# Altium PCB LightsDriver.PcbDoc
Units mm, origin at the board's own origin, x right, y up, seen from the top; angles counter-clockwise.
Board outline 70 x 30 mm, 2 copper layers (Top Layer, Bottom Layer); 37 components, 17 nets, 96 pads, 18 vias.
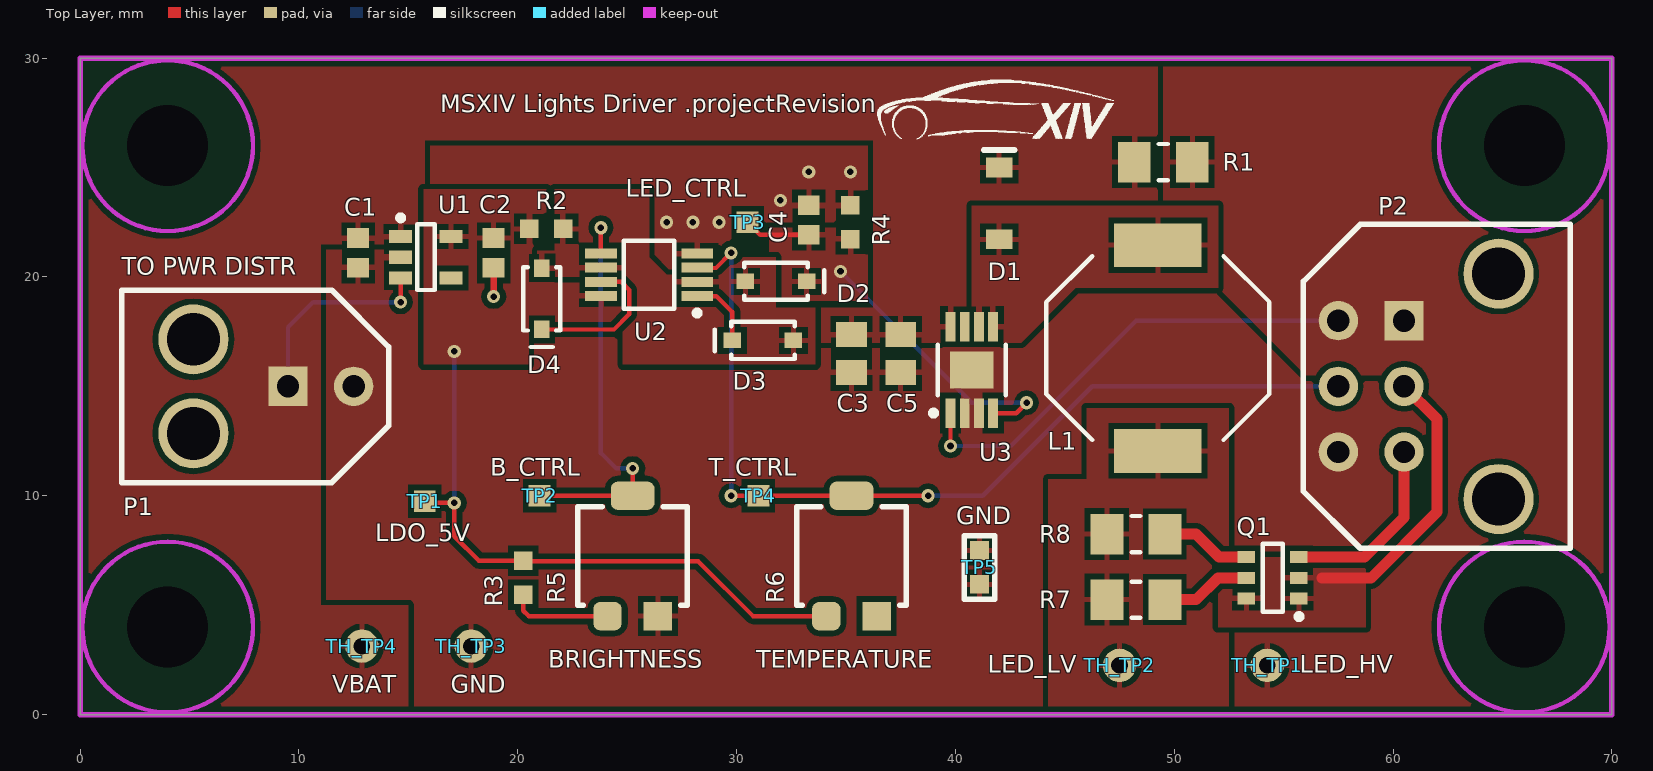
[diagram p0: Top Layer view]
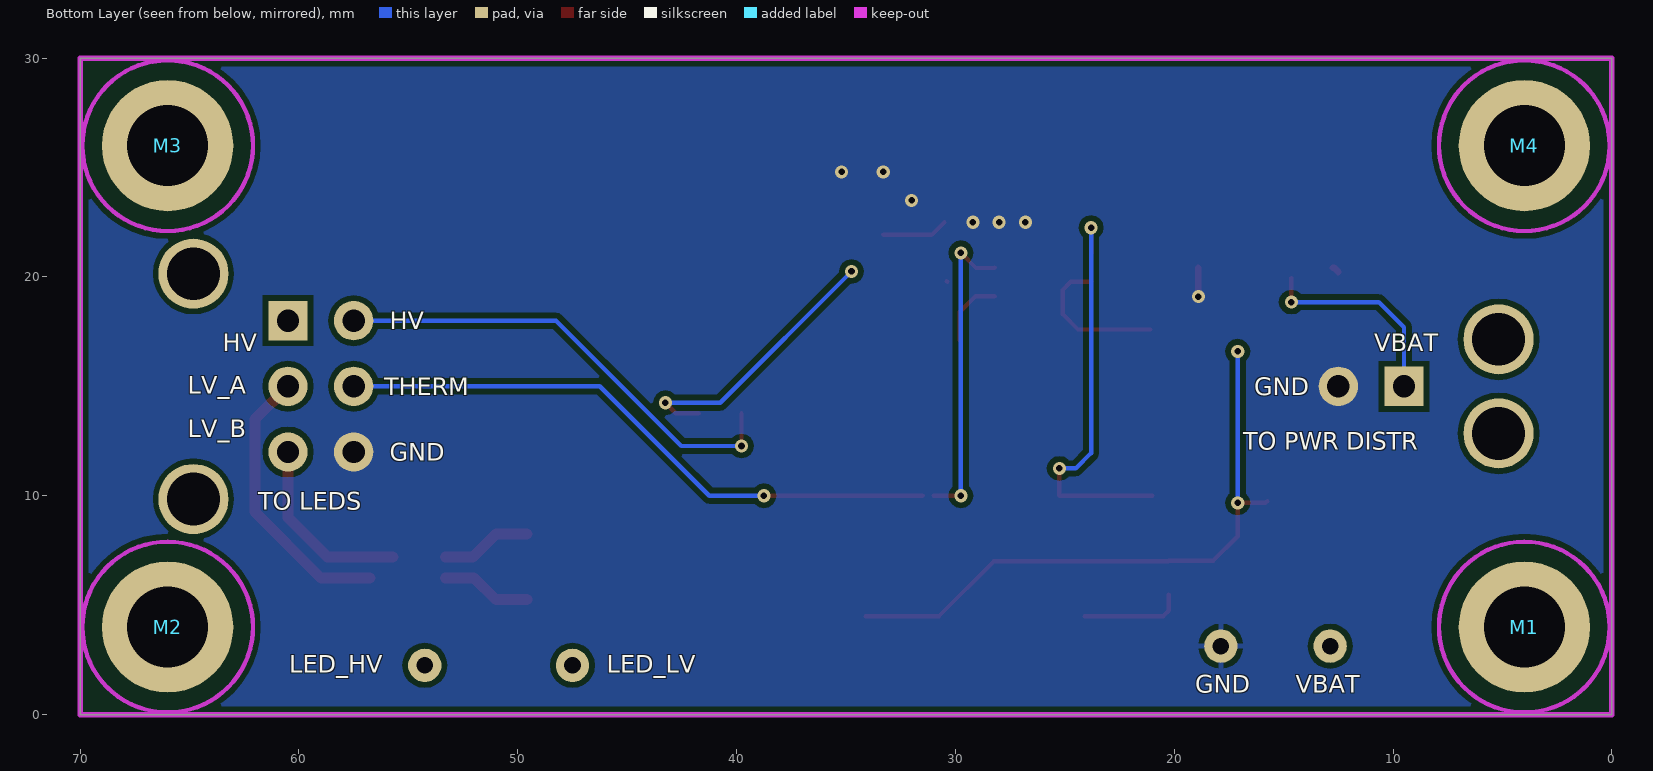
[diagram p1: Bottom Layer view, seen from below]
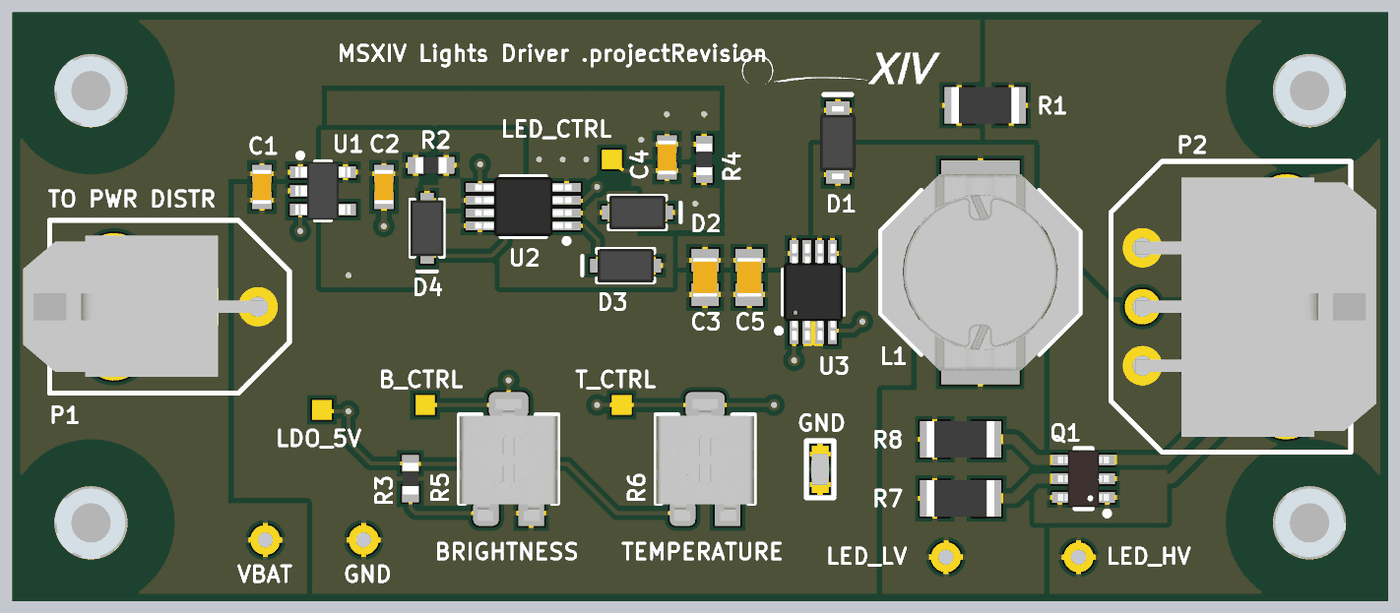
[diagram p2: 3D render of the assembled board from above, using the file's embedded part models]
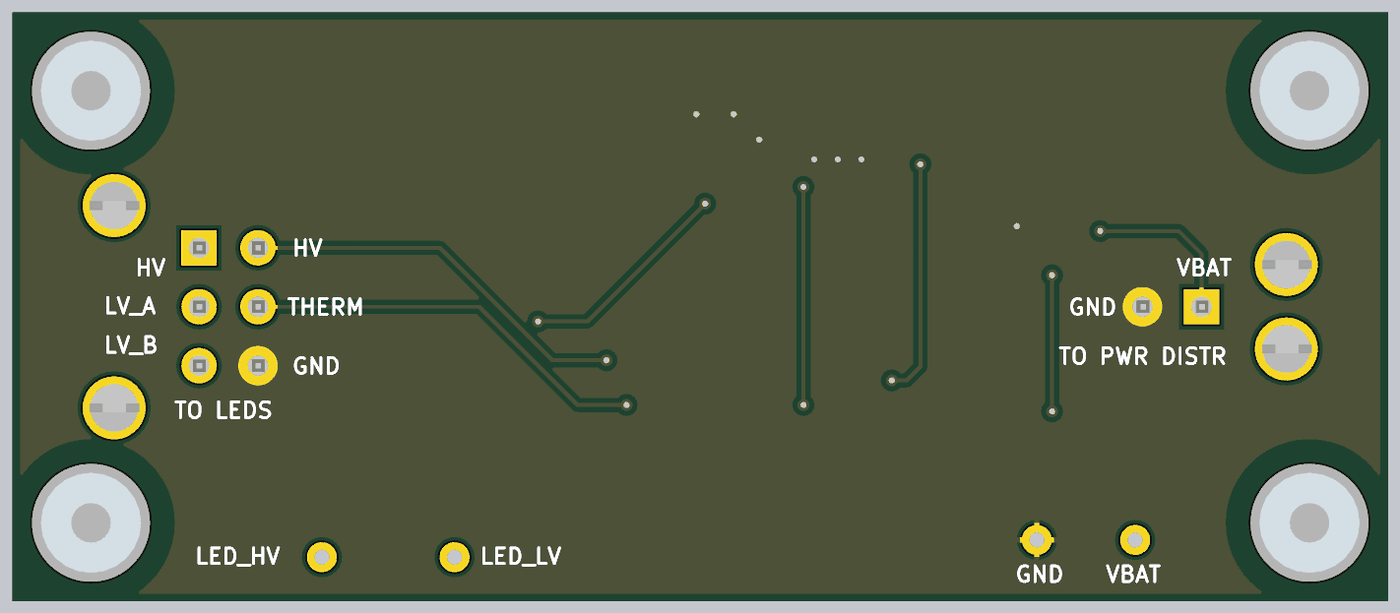
[diagram p3: 3D render of the assembled board from below, using the file's embedded part models]

## Layer stack, top to bottom
Top Solder: solder mask 0.0102, Solder Resist, Dk 3.5
Top Layer: signal copper 0.0356
Dielectric 1: dielectric 0.32, FR-4, Dk 4.8
Bottom Layer: signal copper 0.0356
Bottom Solder: solder mask 0.0102, Solder Resist, Dk 3.5

## Board outline
0,0 70,0 70,30 0,30

## Design rules (kind name [scope] priority, off if disabled: settings)
BoardOutlineClearance [All] p1: gap=0.295 ignorepadtopadclearanceinfootprint=FALSE
Clearance [All] p1: gap=0.254 ignorepadtopadclearanceinfootprint=TRUE except(0: Arc-Hole Track-Hole SMDPad-Hole THPad-Hole Via-Hole Fill-Hole Poly-Hole Region-Hole Text-Hole; 0.152: Arc-Arc Arc-Track Arc-SMDPad Track-Track Track-SMDPad SMDPad-SMDPad)
HoleSize [All] p1: absolutevalues=TRUE maxlimit=6.3 minlimit=0.025 maxpercent=80.000 minpercent=20.000
MinimumSolderMaskSliver [All] p1: minsoldermaskwidth=0.2
PolygonConnect PolygonConnect_Connectors [(InComponent('P1') OR InComponent('P2'))] p1: connectstyle=Direct reliefconductorwidth=0.254 reliefentries=4 polygonreliefangle="90 Angle" airgapwidth=0.254
PolygonConnect PolygonConnect_U3 [InNet('GND') vs InComponent('U3')] p2: thpad.connectstyle=Relief thpad.reliefconductorwidth=0.254 thpad.reliefentries=4 thpad.polygonreliefangle="90 Angle" thpad.airgapwidth=0.254 smdpad.connectstyle=Direct smdpad.reliefconductorwidth=0.254 smdpad.reliefentries=4 smdpad.polygonreliefangle="90 Angle" smdpad.airgapwidth=0.254 via.connectstyle=Direct via.reliefconductorwidth=0.254 via.reliefentries=4 via.polygonreliefangle="90 Angle" via.airgapwidth=0.254
PolygonConnect [All] p3: thpad.connectstyle=Relief thpad.reliefconductorwidth=0.254 thpad.reliefentries=4 thpad.polygonreliefangle="90 Angle" thpad.airgapwidth=0.254 smdpad.connectstyle=Relief smdpad.reliefconductorwidth=0.254 smdpad.reliefentries=4 smdpad.polygonreliefangle="90 Angle" smdpad.airgapwidth=0.254 via.connectstyle=Direct via.reliefconductorwidth=0.254 via.reliefentries=4 via.polygonreliefangle="90 Angle" via.airgapwidth=0.254
RoutingVias [All] p1: holewidth=0.3 width=0.6 viastyle="Through Hole" minholewidth=0.3 minwidth=0.6 maxholewidth=1 maxwidth=2
SilkToSilkClearance [All] p1: silktosilkclearance=0.152
SilkToSolderMaskClearance [IsPad] p1: minsilkscreentomaskgap=0.2 clearancetoexposedcopper=TRUE
SolderMaskExpansion SolderMaskExpansion_Via [IsVia] p1: expansion=0.102 istentingtop=TRUE
SolderMaskExpansion [All] p2: expansion=0.102 istentingtop=FALSE
Width [All] p1: maxlimit=1 minlimit=0.15 preferedwidth=0.2 minimp=50.000000 maximp=50.000000 favimp=50.000000
26 further rules are at their usual default settings.

## Components (designator, comment, footprint, x,y, rotation, side; value= is the part's Value field where it differs from the comment)
C1 "CAP CER 1UF 50V 10% X7R 0603" "CAP, 0603" 12.7,21.1 r270 top
C2 "CAP CER 2.2UF 25V 10% X5R 0603" "CAP, 0603" 18.9,21.1 r270 top
C3 "CAP CER 10uF 25V 10% X5R 0805" "CAP, 0805" 35.25,16.5 r270 top
C4 "CAP CER 10nF 50V 5% X7R 0603" "CAP, 0603" 33.3,22.6 r90 top
C5 "CAP CER 10uF 25V 10% X5R 0805" "CAP, 0805" 37.5,16.5 r270 top
D1 "DIODE SCHOTTKY 40V 1A SOD123F" "DIODE SOD123" 42,25 r270 top
D2 "DIODE GEN PURP 100V 300MA SOD123" "DIODE GEN PURP 100V 300MA SOD123" 31.8,19.8 r180 top
D3 "DIODE GEN PURP 100V 300MA SOD123" "DIODE GEN PURP 100V 300MA SOD123" 31.2,17.1 r0 top
D4 "DIODE GEN PURP 100V 300MA SOD123" "DIODE GEN PURP 100V 300MA SOD123" 21.1,19 r90 top
L1 "IND 100UH 1.2A 220MOHM SMD" "IND 100UH 1.2A 220MOHM SMD" 49.25,16.75 r90 top
M1 "STANDOFF RND M2.5X0.45 STEEL 5MM" "M2.5 Standoff" 4,4 r180 bottom
M2 "STANDOFF RND M2.5X0.45 STEEL 5MM" "M2.5 Standoff" 66,4 r180 bottom
M3 "STANDOFF RND M2.5X0.45 STEEL 5MM" "M2.5 Standoff" 66,26 r180 bottom
M4 "STANDOFF RND M2.5X0.45 STEEL 5MM" "M2.5 Standoff" 4,26 r180 bottom
P1 "TO PWR DISTR" "CONN, 2POS MICRO-FIT R/A 2ROW" 9.5,15 r90 top
P2 "CONN 6POS MICRO-FIT R/A 2ROW 3mm" "CONN, 6POS MICRO-FIT R/A 2ROW" 60.5,18 r270 top
Q1 "BJT NPN DUAL 80V 1A 6-TSOP" "TSOP6 (SOT457)" 54.5,6.25 r180 top
R1 "RES 0.1 OHM 1% 1/4W 1206" "RES 1206" 49.5,25.25 r0 top
R2 "RES 10K OHM 1% 1/10W 0603" "RES, 0603" 21.3,22.2 r0 top
R3 "RES 10K OHM 1% 1/10W 0603" "RES, 0603" 20.25,6.25 r270 top
R4 "RES 100K OHM 5% 1/8W 0603" "RES, 0603" 35.2,22.5 r90 top
R5 "POT 20k OHM 20% 1/4W SMD" "POT TRIMMER 20K" 25.25,10 r270 top
R6 "POT 20k OHM 20% 1/4W SMD" "POT TRIMMER 20K" 35.25,10 r270 top
R7 "RES 1 OHM 1% 1/2W 1206" "RES 1206" 48.25,5.25 r180 top
R8 "RES 1 OHM 1% 1/2W 1206" "RES 1206" 48.25,8.25 r180 top
TH_TP1 "LED_HV" "Thru Test Point" 54.25,2.25 r90 top
TH_TP2 "LED_LV" "Thru Test Point" 47.5,2.25 r90 top
TH_TP3 "GND" "Thru Test Point" 17.873,3.127 r90 top
TH_TP4 "VBAT" "Thru Test Point" 12.873,3.127 r90 top
TP1 "LDO_5V" "Test Point" 15.75,9.75 r0 top
TP2 "B_CTRL" "Test Point" 21,10 r0 top
TP3 "LED_CTRL" "Test Point" 30.5,22.5 r0 top
TP4 "T_CTRL" "Test Point" 31,10 r0 top
TP5 "GND" "TEST POINT 0603 SMD" 41.1,5.95 r90 top
U1 "IC REG LDO 5V 0.1A SOT23-5" SOT95P280X145-5N 15.8,20.9 r0 top
U2 "IC OP AMP DUAL GP RR 10MHZ 8-VSSOP" "IC OP AMP DUAL 8-VSSOP" 26,20.1 r180 top
U3 "IC LED DRIVER AL8860Q MSOP-8EP" "IC LED DRIVER AL8860Q 8-MSOP-EP" 40.75,15.75 r90 top

## Footprints (in the part's own frame and the unit in brackets; to place one, negate y for a bottom-side part, rotate by r counter-clockwise, add the part's x,y. Pads: shape width x height; smd on the part's side, far side on the other; paste and mask are expansions set on the pad)
"CAP, 0603" [mm] "Chip Capacitor, 2-Leads, Body 1.60x0.81mm, IPC Medium Density"
  rect 0.9x1 smd mask+0.076: 1(-0.675,0) 2(0.675,0)
  body extent -0.87,-0.48 0.87,0.48, height 0.9
"CAP, 0805" [mm] "Chip Capacitor, 2-Leads, Body 2.00x1.25mm, IPC Medium Density"
  rect 1.15x1.4 smd: 1(-0.875,0) 2(0.875,0)
  body extent -1,-0.63 1,0.63, height 1.25
"CONN, 2POS MICRO-FIT R/A 2ROW" [mm] "Connector Header Through Hole, Right Angle 2 position 0.118\" (3.00mm)"
  rect 1.8x1.8 hole 1.02: 1(0,0)
  round 1.8 hole 1.02: 2(0,-3)
  round 3.2 hole 2.41: ""(-2.15,4.32) ""(2.15,4.32)
  silkscreen extent -4.4,-4.6 4.4,7.6, body extent -3.58,-3.29 3.62,8.95, height 8.78
"CONN, 6POS MICRO-FIT R/A 2ROW" [mm] "Connector Header Through Hole, Right Angle 6 position 0.118\" (3.00mm)"
  rect 1.8x1.8 hole 1.02: 1(0,0)
  round 1.8 hole 1.02: 2(3,0) 3(6,0) 4(0,-3) 5(3,-3) 6(6,-3)
  round 3.2 hole 2.41: ""(-2.15,4.32) ""(8.15,4.32)
  silkscreen extent -4.4,-4.6 10.4,7.6, body extent -3.58,-3.34 9.62,8.9, height 8.78
"DIODE GEN PURP 100V 300MA SOD123" [mm] "Diode Standard 100V 300mA (DC) Surface Mount SOD-123"
  rect 0.8x0.7 smd: 1(-1.4,0) 2(1.4,0)
  silkscreen extent -2.2,-0.85 1.45,0.85, body extent -1.43,-0.85 1.43,0.85, height 1.35
"DIODE SOD123" [mm]
  rect 0.91x1.22 smd: 1(0,0) 2(3.28,0)
  silkscreen extent -0.8,-0.7 -0.8,0.7, body extent -0.22,-0.9 3.49,0.9, height 1.35
"IC LED DRIVER AL8860Q 8-MSOP-EP" [mm] "TSOP, 8-Leads, Body 3.00x3.00mm, Pitch 0.65mm, Thermal Pad 2.00x1.70mm, IPC Medium Density"
  rect 1.35x0.45 smd: 1(-1.975,0.975) 2(-1.975,0.325) 3(-1.975,-0.325) 4(-1.975,-0.975) 5(1.975,-0.975) 6(1.975,-0.325) 7(1.975,0.325) 8(1.975,0.975)
  rect 1.7x2 smd: 9(0,0)
  silkscreen extent -2.1,-1.55 1.15,1.87, body extent -2.45,-1.5 2.45,1.5, height 1.15
"IC OP AMP DUAL 8-VSSOP" [mm] "VSSOP 8-Leads, Body 3.00x3.00mm, Pitch 0.65mm, IPC Medium Density"
  rect 1.45x0.45 smd: 1(-2.2,0.975) 2(-2.2,0.325) 3(-2.2,-0.325) 4(-2.2,-0.975) 5(2.2,-0.975) 6(2.2,-0.325) 7(2.2,0.325) 8(2.2,0.975)
  silkscreen extent -2.33,-1.55 1.15,1.87, body extent -2.45,-1.5 2.45,1.5, height 1.1
"IND 100UH 1.2A 220MOHM SMD" [mm] "Inductor, 2-Leads, Body 10.00x10.00mm, IPC Medium Density"
  rect 2x4 smd: 1(-4.7,0) 2(4.7,0)
  silkscreen extent -4.2,-5.1 4.2,5.1, body extent -5,-5 5,5, height 4.8
"M2.5 Standoff" [mm]
  round 0 hole 3.7: ""(0,0)
  round 6 smd: ""(0,0)
  Top Layer keep-out circle w0.2: c0,0 r3.9
  Bottom Layer keep-out circle w0.2: c0,0 r3.9
  body extent -2.55,-2.55 2.55,2.55, height 5
"POT TRIMMER 20K" [mm]
  rect 1.3x1.3 smd: 1(5.5,1.15)
  rrect50% 1.3x2 smd: 2(0,0)
  rrect50% 1.3x1.3 smd: 3(5.5,-1.15)
  silkscreen extent 0.5,-2.5 5,2.5, body extent -0.3,-2.5 5.9,2.5, height 2.74
"RES 1206" [mm] "Chip Resistor, 2-Leads, Body 3.20x1.60mm, IPC Medium Density"
  rect 1.5x1.85 smd: 1(-1.325,0) 2(1.325,0)
  silkscreen extent -0.2,-0.82 0.2,0.82, body extent -1.73,-0.92 1.73,0.92, height 0.64
"RES, 0603" [mm] "Chip Resistor, 2-Leads, Body 1.60x0.80mm, IPC Medium Density"
  rect 0.85x0.85 smd: 1(-0.775,0) 2(0.775,0)
  body extent -0.8,-0.4 0.8,0.4, height 0.55
SOT95P280X145-5N [mm] "SOT23, 5-Leads, Body 2.95x2.80mm, Pitch 0.95mm, IPC Medium Density"
  rect 1.05x0.6 smd: 1(-1.15,0.95) 2(-1.15,0) 3(-1.15,-0.95) 4(1.15,-0.95) 5(1.15,0.95)
  silkscreen extent -1.27,-1.5 0.4,1.92, body extent -1.4,-1.48 1.4,1.48, height 1.45
"Test Point" [mm]
  rect 1x1 smd paste-2: TP(0,0)
"TEST POINT 0603 SMD" [mm]
  rect 0.85x0.85 smd paste-2 mask+0.102: 1(0,0)
  rect 0.85x0.85 smd paste-2: 1(1.55,0)
  silkscreen extent -0.67,-0.7 2.22,0.7, body extent -0.02,-0.45 1.58,0.45, height 1.09
"Thru Test Point" [mil]
  round 60 hole 30: TH_TP(0,0)
"TSOP6 (SOT457)" [mm]
  rect 0.8x0.55 smd: 1(-1.2,0.95) 2(-1.2,0) 3(-1.2,-0.95) 4(1.2,-0.95) 5(1.2,0) 6(1.2,0.95)
  silkscreen extent -1.33,-1.55 0.45,1.9, body extent -1.3,-1.45 1.3,1.45, height 1.09

## Part data
C1: "1µF ±10% 50V Ceramic Capacitor X7R 0603 (1608 Metric)", Capacitance=1µF, Manufacturer 1="Taiyo Yuden", Manufacturer Part Number 1=UMK107AB7105KA-T, Operating Temperature="-55°C ~ 125°C", Package / Case="0603 (1608 Metric)", Ratings=-, Supplier Part Number 1=587-3247-1-ND, Temperature Coefficient=X7R, Tolerance=±10%, Voltage=50V, ComponentLink1Description=http://www.yuden.co.jp/productdata/catalog/en/mlcc_all_e.pdf, ComponentLink1URL=http://www.yuden.co.jp/productdata/catalog/en/mlcc_all_e.pdf, Height - Seated (Max)=-, Lead Spacing=-, Lead Style=-, Mounting Type="Surface Mount, MLCC", Packaging="Cut Tape (CT)", Part Status=Active, Size / Dimension="0.063\" L x 0.031\" W (1.60mm x 0.80mm)", Supplier 1=Digi-Key, Thickness (Max)="0.037\" (0.95mm)"
C2: "2.2µF ±10% 25V Ceramic Capacitor X5R 0603 (1608 Metric)", Capacitance=2.2µF, Manufacturer 1="Murata Electronics North America", Manufacturer Part Number 1=GRM188R61E225KA12D, Operating Temperature="-55°C ~ 85°C", Package / Case="0603 (1608 Metric)", Ratings=-, Supplier Part Number 1=490-10731-1-ND, Temperature Coefficient=X5R, Tolerance=±10%, Voltage=25V, ComponentLink1Description=http://www.murata.com/~/media/webrenewal/support/library/catalog/products/capacitor/mlcc/c02e.ashx, ComponentLink1URL=http://www.murata.com/~/media/webrenewal/support/library/catalog/products/capacitor/mlcc/c02e.ashx, Height - Seated (Max)=-, Lead Spacing=-, Lead Style=-, Mounting Type="Surface Mount, MLCC", Packaging="Cut Tape (CT)", Part Status=Active, Size / Dimension="0.063\" L x 0.031\" W (1.60mm x 0.80mm)", Supplier 1=Digi-Key, Thickness (Max)="0.035\" (0.90mm)"
C3 C5: "10µF ±10% 25V Ceramic Capacitor X5R 0805 (2012 Metric)", Capacitance=10µF, Manufacturer="Murata Electronics North America", Manufacturer Part Number=GRM21BR61E106KA73L, Operating Temperature="-55°C ~ 85°C", Package / Case="0805 (2012 Metric)", Ratings=-, Supplier Part Number 1=490-5523-1-ND, Temperature Coefficient=X5R, Tolerance=±10%, Voltage - Rated=25V, Applications="General Purpose", Category=Capacitors, ComponentLink1Description=http://search.murata.co.jp/Ceramy/image/img/A01X/G101/ENG/GRM21BR61E106KA73-01.pdf, ComponentLink1URL=http://search.murata.co.jp/Ceramy/image/img/A01X/G101/ENG/GRM21BR61E106KA73-01.pdf, Features=-, Height - Seated (Max)=-, Lead Spacing=-, Lead Style=-, Mounting Type="Surface Mount, MLCC", Packaging="Cut Tape (CT)", Part Status=Active, Pricing 1="1=0.3, 10=0.214, 100=0.1008, 500=0.07068, 1000=0.05851 (CAD)", RoHS="RoHS Compliant", Size / Dimension="0.079\" L x 0.049\" W (2.00mm x 1.25mm)", Stock 1=1695157, Supplier 1=Digi-Key, Thickness (Max)="0.053\" (1.35mm)"
C4: "10000pF ±5% 50V Ceramic Capacitor U2J 0603 (1608 Metric)", Capacitance=10000pF, Manufacturer 1=KEMET, Manufacturer Part Number 1=C0603C103J5JAC7867, Operating Temperature="-55°C ~ 125°C", Package / Case="0603 (1608 Metric)", Ratings=-, Supplier Part Number 1=399-13384-1-ND, Temperature Coefficient=U2J, Tolerance=±5%, Voltage=50V, ComponentLink1Description=http://www.kemet.com/docfinder?Partnumber=C0603C103J5JAC7867, ComponentLink1URL=http://www.kemet.com/docfinder?Partnumber=C0603C103J5JAC7867, Failure Rate=-, Height - Seated (Max)=-, Lead Spacing=-, Lead Style=-, Mounting Type="Surface Mount, MLCC", Packaging="Cut Tape (CT)", Part Status=Active, Size / Dimension="0.063\" L x 0.032\" W (1.60mm x 0.80mm)", Supplier 1=Digi-Key, Thickness (Max)="0.034\" (0.87mm)"
D1: Average Rectified Current=1A, Case/Package=SOD, Manufacturer="ON Semiconductor / Fairchild", Manufacturer Part Number=SS14FL, Max Forward Surge Current (Ifsm)=40A, Max Repetitive Reverse Voltage (Vrrm)=40V, Supplier Part Number 1=SS14FLCT-ND, Category="Rectifier Diodes", ComponentLink1Description=http://www.farnell.com/datasheets/2552650.pdf?src-supplier=Farnell, ComponentLink1URL=http://www.farnell.com/datasheets/2552650.pdf?src-supplier=Farnell, ComponentLink2Description=https://www.onsemi.com/pub/Collateral/SS14FL-D.PDF?src-supplier=Digi-Key, ComponentLink2URL=https://www.onsemi.com/pub/Collateral/SS14FL-D.PDF?src-supplier=Digi-Key, ComponentLink3Description=https://www.fairchildsemi.com/datasheets/SS/SS13FL.pdf?src-supplier=Digi-Key, ComponentLink3URL=https://www.fairchildsemi.com/datasheets/SS/SS13FL.pdf?src-supplier=Digi-Key, Element Configuration=Single, Max Reverse Voltage (DC)=40V, Mount="Surface Mount", Packaging="Tape and Reel", Pricing 1="1=0.25000, 10=0.20900, 25=0.17480, 100=0.08540, 250=0.08400, 500=0.07120, 1000=0.04947 (USD)", Reverse Recovery Time=5.695ns, RoHS=Yes, Stock 1=36912, Supplier 1=Digi-Key, Weight=0.0276g
D2 D3 D4: "Diode Standard 100V 300mA (DC) Surface Mount SOD-123", Case/Package=SOD-123-2, Forward Current=300mA, Forward Voltage=1.25V, Manufacturer="Diodes Zetex", Manufacturer Part Number=1N4148WQ-7-F, Max Operating Temperature=150°C, Max Power Dissipation=400mW, Max Repetitive Reverse Voltage (Vrrm)=100V, Max Surge Current=2A, Min Operating Temperature=-65°C, Package Quantity=3000, Peak Reverse Current=50uA, Supplier Part Number 1=1N4148WQ-7-FDICT-ND, ComponentLink1Description=http://components.arrow.com/part/dataview/0323_07206809, ComponentLink1URL=http://components.arrow.com/part/dataview/0323_07206809, ComponentLink2Description=http://www.diodes.com/datasheets/ds30086.pdf, ComponentLink2URL=http://www.diodes.com/datasheets/ds30086.pdf, ComponentLink3Description=http://www.mouser.com/ds/2/115/ds30086-318161.pdf, ComponentLink3URL=http://www.mouser.com/ds/2/115/ds30086-318161.pdf, Contact Plating=Tin,Matte, Element Configuration=Single, Lead Free="Lead Free", Mount="Surface Mount", Number of Pins=2, Packaging="Tape and Reel", Peak Non-Repetitive Surge Current=2A, Pricing 1="1=0.22, 10=0.196, 100=0.107, 500=0.0658, 1000=0.0449 (USD)", Recovery Time=4ns, Reverse Recovery Time=4ns, Stock 1=229, Supplier 1=Digi-Key, Weight=0.000353oz
L1: "Inductor Power Shielded Wirewound 100uH 30% 100KHz 26Q-Factor Ferrite 1.2A 220mOhm DCR Automotive T/R", Case/Package=Nonstandard, Current Rating=1.2A, DC Resistance (DCR)=220mR, Inductance=100uH, Inductance Tolerance=30%, Manufacturer=Bourns, Manufacturer Part Number=SRU1048A-101Y, Max Operating Temperature=125°C, Min Operating Temperature=-40°C, Package Quantity=600, Ratings=AEC-Q200, Saturation Current=1A, Self Resonant Frequency=5MHz, Supplier Part Number 1=SRU1048A-101YCT-ND, Test Frequency=100kHz, Category="Fixed Inductors", ComponentLink1Description=https://datasheet.ciiva.com/48684/sru1048a-48684678.pdf?src-supplier=Avnet, ComponentLink1URL=https://datasheet.ciiva.com/48684/sru1048a-48684678.pdf?src-supplier=Avnet, ComponentLink2Description=https://datasheet.ciiva.com/41859/sru1048a-41859752.pdf?src-supplier=Digi-Key, ComponentLink2URL=https://datasheet.ciiva.com/41859/sru1048a-41859752.pdf?src-supplier=Digi-Key, Composition=Wirewound, Core Material=Ferrite, Depth=10.3mm, Height=4.8mm, Height - Seated (Max)=0.201inch, Length=0.394inch, Max DC Current=1.2A, Military Standard=Not, Mount="Surface Mount", Packaging="Cut Tape", Pricing 1="1=1.17000, 10=1.08400, 100=0.78370 (USD)", REACH SVHC="No SVHC", RMS Current (Irms)=1.2A, RoHS=Yes, Shielding=Shielded, Stock 1=69, Supplier 1=Digi-Key, Tolerance=30%, Width=0.394inch
M1 M2 M3 M4: Manufacturer="Wurth Electronics", Manufacturer Part Number=9774050151R, Supplier Part Number 1=732-7095-1-ND, Length=0.252inch, Material=Steel, Outside Diameter=0.201inch, Plating=Tin, Pricing 1="1 = 1.09000, 10 = 1.03000, 50 = 0.91800, 100 = 0.84000 (USD)", REACH SVHC=Unknown, RoHS=Yes, Screw-Thread Size=M2.5x0.45, Standoff Height=5mm, Stock 1=24846, Supplier 1=Digi-Key, Threaded/Unthreaded=Threaded
P1: library part "CONN 2POS MICRO-FIT R/A 2ROW 3mm", "Header Connector, Pcb Mount, Recept, 2 Contacts, Pin, 0.118 Pitch, R Angle Pc Tail Terminal", Case/Package=Metal, Color=Black, Contact Resistance=10mR, Current Rating=5A, Manufacturer=Molex, Manufacturer Part Number=43045-0221, Max Operating Temperature=105°C, Max Voltage Rating (DC)=250.25kV, Min Operating Temperature=-40°C, Package Quantity=1, Supplier Part Number 1=WM2672-ND, Voltage Rating=250V, Category="Headers and Wire Housings", ComponentLink1Description=https://datasheet.ciiva.com/5152/0430450221-pcb-headers-142766-5152032.pdf?src-supplier=Mouser, ComponentLink1URL=https://datasheet.ciiva.com/5152/0430450221-pcb-headers-142766-5152032.pdf?src-supplier=Mouser, ComponentLink2Description=https://datasheet.ciiva.com/16725/0430450221-pcb-headers-16725479.pdf?src-supplier=Avnet+Europe, ComponentLink2URL=https://datasheet.ciiva.com/16725/0430450221-pcb-headers-16725479.pdf?src-supplier=Avnet+Europe, ComponentLink3Description=https://datasheet.ciiva.com/11752/0900766b80d438f8-11752889.pdf?src-supplier=RSComponents, ComponentLink3URL=https://datasheet.ciiva.com/11752/0900766b80d438f8-11752889.pdf?src-supplier=RSComponents, ComponentLink4Description=https://datasheet.ciiva.com/30062/187650430450221-pcb-headers-30062367.pdf?src-supplier=Onlinecomponents.com, ComponentLink4URL=https://datasheet.ciiva.com/30062/187650430450221-pcb-headers-30062367.pdf?src-supplier=Onlinecomponents.com, ComponentLink5Description=https://datasheet.ciiva.com/7920/1629737-7920746.pdf?src-supplier=Element14, ComponentLink5URL=https://datasheet.ciiva.com/7920/1629737-7920746.pdf?src-supplier=Element14, ComponentLink6Description=https://datasheet.ciiva.com/726/430450221-sd-726236.pdf?src-supplier=Digi-Key, ComponentLink6URL=https://datasheet.ciiva.com/726/430450221-sd-726236.pdf?src-supplier=Digi-Key, Connector Type="Male Pin", Contact Material=Brass, Contact Plating=Tin, Fastening Type=Ramp, Gender=Male, Glow Wire Compliant=Compliant, Halogen Free="Low Halogen", Housing Material=Thermoplastic, Mount="Through Hole", Number of Circuits=2, Number of Contacts=2, Number of Positions=2, Number of Rows=2, Orientation="Right Angle", Packaging=Tray, Pitch=3mm, Pricing 1="1=1.19000, 10=1.04400, 100=0.90070, 500=0.73692, 3168=0.59363, 6336=0.57316, 12672=0.53222 (USD)", RoHS=Yes, Row Spacing=0.118inch, Stock 1=1557, Supplier 1=Digi-Key, Termination=Solder
P2: "Conn Wire to Board HDR 6 POS 3mm Solder RA Thru-Hole Micro-Fit 3.0™ Tray", Color=Black, Contact Resistance=10mR, Current Rating=5A, Flammability Rating="UL94 V-0", Insulation Resistance=1GR, Manufacturer=Molex, Manufacturer Part Number=043045-0621, Max Operating Temperature=105°C, Min Operating Temperature=-40°C, Supplier Part Number 1=WM2674-ND, Voltage Rating (DC)=250V, Category="Headers and Wire Housings", ComponentLink1Description=http://components.arrow.com/part/dataview/2943185S8703233N3303?src-supplier=Arrow, ComponentLink1URL=http://components.arrow.com/part/dataview/2943185S8703233N3303?src-supplier=Arrow, ComponentLink2Description=http://components.arrow.com/part/dataview/0323_01056240?src-supplier=Arrow+Europe, ComponentLink2URL=http://components.arrow.com/part/dataview/0323_01056240?src-supplier=Arrow+Europe, ComponentLink3Description=https://www.molex.com/pdm_docs/sd/430450221_sd.pdf?src-supplier=Digi-Key, ComponentLink3URL=https://www.molex.com/pdm_docs/sd/430450221_sd.pdf?src-supplier=Digi-Key, Connector Type="Male Pin", Contact Material=Brass, Contact Plating=Tin, Depth=12.2mm, Fastening Type=Ramp, Gender=Female, Glow Wire Compliant=Compliant, Halogen Free="Low Halogen", Housing Color=Black, Housing Material=Polymer, Length=13.15mm, Mount="Through Hole", Number of Circuits=6, Number of Contacts=6, Number of Positions=6, Number of Rows=2, Orientation="Right Angle", Packaging=Tray, Pitch=3mm, Pricing 1="1=1.89000, 10=1.71500, 100=1.46960, 500=1.22466, 1000=1.04970, 5000=0.93073, 10000=0.90974 (USD)", RoHS=Yes, Row Spacing=0.118inch, Stock 1=170, Supplier 1=Digi-Key, Termination=Solder
Q1: "Bipolar (BJT) Transistor Array 2 PNP (Dual) Matched Pair 80V 1A 140MHz 500mW Surface Mount 6-TSOP", Manufacturer=Nexperia, Manufacturer Part Number=BCM56DSF, Supplier Part Number 1=1727-7829-1-ND, Pricing 1="1=0.35000, 10=0.28200, 25=0.25800, 100=0.16200, 250=0.16020, 500=0.15000, 1000=0.10200, 2500=0.09780, 5000=0.09000 (USD)", RoHS=No, Stock 1=9949, Supplier 1=Digi-Key
R1: "Res Thick Film 1206 0.1 Ohm 1% 0.25W(1/4W) ±600ppm/C Molded SMD Paper T/R", Case Code (Imperial)=1206, Case Code (Metric)=3216, Manufacturer=Yageo, Manufacturer Part Number=RL1206FR-070R1L, Max Operating Temperature=125°C, Max Power Dissipation=250mW, Min Operating Temperature=-55°C, Package Quantity=1, Power Rating=1/4W, Resistance=100mR, Supplier Part Number 1=311-0.1LWCT-ND, Temperature Coefficient=600ppm/°C, Tolerance=1%, Case/Package=1206, Category="Chip SMD Resistors", ComponentLink1Description=https://datasheet.ciiva.com/5558/pyu-rl-hp-521-rohs-l-2-5558071.pdf?src-supplier=Mouser, ComponentLink1URL=https://datasheet.ciiva.com/5558/pyu-rl-hp-521-rohs-l-2-5558071.pdf?src-supplier=Mouser, ComponentLink2Description=https://datasheet.ciiva.com/22699/877049-22699038.pdf?src-supplier=Element14, ComponentLink2URL=https://datasheet.ciiva.com/22699/877049-22699038.pdf?src-supplier=Element14, Composition="Thick Film", Contact Plating=Tin,Lead, Depth=1.6mm, Features="Moisture Resistant", Height=0.026inch, Lead Free="Lead Free", Length=3.1mm, Military Standard=Not, Number of Terminations=2, Packaging="Tape and Reel", Pricing 1="1=0.38000, 10=0.29200, 100=0.12250, 1000=0.06760, 2500=0.06338 (USD)", REACH SVHC=Unknown, RoHS=Yes, Stock 1=37786, Supplier 1=Digi-Key, Termination=SMD/SMT, Width=0.063inch
R2 R3: "RES SMD 10K OHM 1% 1/10W 0603", Manufacturer 1=Yageo, Manufacturer Part Number 1=RC0603FR-0710KL, Operating Temperature="-55°C ~ 155°C", Package / Case="0603 (1608 Metric)", Power=1/10W, Resistance=10k, Supplier Device Package=0603, Supplier Part Number 1=311-10.0KHRCT-ND, Temperature Coefficient=±100ppm/°C, Tolerance=±1%, ComponentLink1Description=http://www.yageo.com/documents/recent/PYu-RC_Group_51_RoHS_L_7.pdf, ComponentLink1URL=http://www.yageo.com/documents/recent/PYu-RC_Group_51_RoHS_L_7.pdf, Composition="Thick Film", Failure Rate=-, Height - Seated (Max)="0.022\" (0.55mm)", Packaging="Cut Tape (CT)", Part Status=Active, Size / Dimension="0.063\" L x 0.031\" W (1.60mm x 0.80mm)", Supplier 1=Digi-Key
R4: "RES SMD 100K OHM 5% 1/10W 0603", Manufacturer 1=Yageo, Manufacturer Part Number 1=RC0603JR-07100KL, Operating Temperature="-55°C ~ 155°C", Package / Case="0603 (1608 Metric)", Power=1/10W, Resistance=100k, Supplier Device Package=0603, Supplier Part Number 1=311-100KGRCT-ND, Temperature Coefficient=±100ppm/°C, Tolerance=±5%, ComponentLink1Description=http://www.yageo.com/documents/recent/PYu-RC_Group_51_RoHS_L_7.pdf, ComponentLink1URL=http://www.yageo.com/documents/recent/PYu-RC_Group_51_RoHS_L_7.pdf, Composition="Thick Film", Failure Rate=-, Height - Seated (Max)="0.022\" (0.55mm)", Packaging="Cut Tape (CT)", Part Status=Active, Size / Dimension="0.063\" L x 0.031\" W (1.60mm x 0.80mm)", Supplier 1=Digi-Key
R5 R6: "20 kOhms 0.25W, 1/4W Gull Wing Surface Mount Trimmer Potentiometer Cermet 1 Turn Top Adjustment", Insulation Resistance=100MR, Manufacturer="TT BI", Manufacturer Part Number=23BR20KLFTR, Max Operating Temperature=125°C, Max Power Dissipation=250mW, Min Operating Temperature=-55°C, Package Quantity=1, Power Rating=1/4W, Resistance=20kR, Supplier Part Number 1=987-1016-1-ND, Temperature Coefficient=100ppm/°C, Tolerance=20%, Voltage Rating=200V, Category="Variable Resistors and Potentiometers", ComponentLink1Description=https://datasheet.ciiva.com/3890/42287794s7870631n1290-3890844.pdf?src-supplier=Arrow, ComponentLink1URL=https://datasheet.ciiva.com/3890/42287794s7870631n1290-3890844.pdf?src-supplier=Arrow, ComponentLink2Description=https://datasheet.ciiva.com/1130/4708-1130034.pdf?src-supplier=Element14, ComponentLink2URL=https://datasheet.ciiva.com/1130/4708-1130034.pdf?src-supplier=Element14, ComponentLink3Description=https://datasheet.ciiva.com/14186/tz23-b-dat-e-14186231.pdf?src-supplier=Distrelec, ComponentLink3URL=https://datasheet.ciiva.com/14186/tz23-b-dat-e-14186231.pdf?src-supplier=Distrelec, Composition=Cermet, Depth=6.2mm, Height=0.106inch, Lead Free="Lead Free", Length=5mm, Military Standard=Not, Mount="Surface Mount", Number of Turns=1, Packaging="Tape and Reel", Pricing 1="1=1.27000, 10=1.12200, 25=1.01000, 50=0.97240, 100=0.93500, 250=0.87892 (USD)", Radiation Hardening=No, REACH SVHC="No SVHC", RoHS=Yes, Stock 1=2071, Supplier 1=Digi-Key, Termination="Gull Wing", Type=Potentiometer, Voltage Rating (DC)=200V, Weight=0.004938oz, Width=4.5mm
R7 R8: "BOURNS - CRM1206AFX-1R00ELF - RES, 1R, 1%, 1206, THICK FILM", Case Code (Imperial)=1206, Case Code (Metric)=3216, Manufacturer=Bourns, Manufacturer Part Number=CRM1206AFX-1R00ELF, Max Operating Temperature=155°C, Max Power Dissipation=1/2W, Min Operating Temperature=-55°C, Resistance=1R, Supplier Part Number 1=CRM1206AFX-1R00ELFCT-ND, Temperature Coefficient=100ppm/°C, Tolerance=1%, Case/Package=1206, ComponentLink1Description=http://www.farnell.com/datasheets/2552937.pdf?src-supplier=Farnell, ComponentLink1URL=http://www.farnell.com/datasheets/2552937.pdf?src-supplier=Farnell, ComponentLink2Description=https://www.bourns.com/docs/product-datasheets/crm-a.pdf?src-supplier=Digi-Key, ComponentLink2URL=https://www.bourns.com/docs/product-datasheets/crm-a.pdf?src-supplier=Digi-Key, ComponentLink3Description=http://www.farnell.com/datasheets/2552937.pdf?src-supplier=Newark, ComponentLink3URL=http://www.farnell.com/datasheets/2552937.pdf?src-supplier=Newark, ComponentLink4Description=http://www.farnell.com/datasheets/2552937.pdf?src-supplier=Element14, ComponentLink4URL=http://www.farnell.com/datasheets/2552937.pdf?src-supplier=Element14, Composition="Thick Film", Features="Automotive AEC-Q200,Anti-Sulfur", Number of Terminations=2, Packaging="Cut Tape", Pricing 1="1=0.14000, 10=0.12100, 100=0.04730, 1000=0.01980, 2500=0.01815 (USD)", RoHS=No, Stock 1=9624, Supplier 1=Digi-Key
TH_TP1 TH_TP2 TH_TP3 TH_TP4: library part "Thru Test Point"
TP1 TP2 TP3 TP4: library part "Test Point"
TP5: library part "Test Point 0603 SMD", Case Code (Imperial)=0603, Case Code (Metric)=1608, Colour=Natural, Manufacturer 1="TE Connectivity", Manufacturer Part Number 1=1625854-3, Max Operating Temperature=125°C, Min Operating Temperature=-55°C, Package Quantity=2000, Resistance=0mR, Supplier Part Number 1=A106145CT-ND, Case/Package=0603, ComponentLink1Description=https://datasheet.ciiva.com/30100/1773266-a-30100967.pdf, ComponentLink1URL=https://datasheet.ciiva.com/30100/1773266-a-30100967.pdf, ComponentLink2Description=https://datasheet.ciiva.com/8914/eng-ds-1773266-a-8914634.pdf, ComponentLink2URL=https://datasheet.ciiva.com/8914/eng-ds-1773266-a-8914634.pdf, ComponentLink3Description=https://datasheet.ciiva.com/6439/eng-ds-1773266-a-6439163.pdf, ComponentLink3URL=https://datasheet.ciiva.com/6439/eng-ds-1773266-a-6439163.pdf, ComponentLink4Description=https://datasheet.ciiva.com/6439/eng-ds-1773266-a-6439164.pdf, ComponentLink4URL=https://datasheet.ciiva.com/6439/eng-ds-1773266-a-6439164.pdf, ComponentLink5Description=https://datasheet.ciiva.com/6439/eng-ds-1773266-a-6439165.pdf, ComponentLink5URL=https://datasheet.ciiva.com/6439/eng-ds-1773266-a-6439165.pdf, Depth=0.8mm, Description 1="Thick Film Resistors - SMD 2000", Height=1.15mm, Length=1.6mm, Military Standard=Not, Mount="Surface Mount", Packaging="Tape and Reel", Pricing 1="1=0.22, 10=0.211, 25=0.18, 50=0.1574, 100=0.1462, 250=0.12932, 500=0.12368, 1000=0.1012 (USD)", Radiation Hardening=No, Stock 1=212628, Supplier 1=Digi-Key, Termination=SMD/SMT, Width=0.8mm
U1: "Linear Voltage Regulator IC Positive Fixed Output 5V 100mA SOT-23-5", Current - Limit (Min)=-, Current - Output=100mA, Manufacturer 1=STMicroelectronics, Manufacturer Part Number 1=LD2981CM50TR, Operating Temperature="-40°C ~ 125°C", Package / Case="SC-74A, SOT-753", Supplier Device Package=SOT-23-5, Supplier Part Number 1=497-7787-1-ND, Voltage - Dropout (Typical)="0.18V @ 100mA", Voltage - Input="Up to 16V", Voltage - Output=5V, ComponentLink1Description=http://www.st.com/content/ccc/resource/technical/document/datasheet/group1/b7/b5/a1/83/9c/bd/4a/90/CD00001635/files/CD00001635.pdf/jcr:content/translations/en.CD00001635.pdf, ComponentLink1URL=http://www.st.com/content/ccc/resource/technical/document/datasheet/group1/b7/b5/a1/83/9c/bd/4a/90/CD00001635/files/CD00001635.pdf/jcr:content/translations/en.CD00001635.pdf, Mounting Type="Surface Mount", Packaging="Cut Tape (CT)", Part Status=Active, Regulator Topology="Positive Fixed", Supplier 1=Digi-Key
U2: "General Purpose Amplifier 2 Circuit Rail-to-Rail 8-VSSOP", Case/Package=VSSOP, Input Bias Current=5pA, Input Offset Voltage (Vos)=250uV, Manufacturer="Texas Instruments", Manufacturer Part Number=OPA2197IDGKR, Max Operating Temperature=125°C, Min Operating Temperature=-40°C, Operating Supply Current=1mA, Output Current per Channel=65mA, Supplier Part Number 1=296-47349-1-ND, ComponentLink1Description=http://www.ti.com/lit/ds/symlink/opa2197.pdf, ComponentLink1URL=http://www.ti.com/lit/ds/symlink/opa2197.pdf, Gain Bandwidth Product=10MHz, Lead Free="Lead Free", Mount="Surface Mount", Number of Channels=2, Number of Circuits=2, Packaging="Tape and Reel", Pricing 1="1=2.41, 10=2.162, 100=1.7376, 500=1.4276, 1000=1.1829 (USD)", Slew Rate=20V/µs, Stock 1=2171, Supplier 1=Digi-Key
U3: "AL8860 Series 40 V 1.5 A SMT High Efficiency Buck LED Driver - MSOP-8EP", Manufacturer=Diodes, Manufacturer Part Number=AL8860QMP-13, Supplier Part Number 1=AL8860QMP-13DICT-ND, Pricing 1="1=0.57000, 10=0.50000, 25=0.46960, 100=0.35600, 250=0.30300, 500=0.28786, 1000=0.21968 (USD)", RoHS=No, Stock 1=2189, Supplier 1=Digi-Key

## Via types
v1: diameter 0.6, hole 0.3, Top Layer to Bottom Layer, tented both sides, 18 vias

## Nets (pads, with @x,y where several pads share a name; then routed paths per layer and width w, separated by ;. In a path a pad name is that pad's centre, name@x,y a point inside that pad or via, vN(x,y) a via of type N, cw(c..) or ccw(c..) an arc to the next point about the centre after c; other vN are vias at no path point)
GND: C1.2 C2.2 C3.2 C4.2 C5.2 P1.2 P2.6 R4.2 R5.1 TH_TP3.TH_TP TP5.1 U1.2 U2.4 U3.2 U3.3 U3.9 | length 1.7
  Top Layer w0.3: C1.2@12.5,20.225 C1.2 C1.2@12.75,20.425 ; v1(18.9,19.1) C2.2
  other v1: 26.8,22.5 28,22.5 29.2,22.5 32,23.5 33.3,24.8 35.2,24.8
LDO_5V: C2.1 R2.1 R3.1 R6.3 TP1.TP U1.5 U2.8 | length 28.3
  Top Layer w0.2: TP1.TP 15.825,9.675 v1(17.1,9.675) 17.1,8.15 18.225,7.025 R3.1 20.275,7 28.25,7 30.75,4.5 R6.3
  Bottom Layer w0.2: v1(17.1,9.675) v1(17.1,16.6)
LED_HV: P2.1 P2.4 R1.2 TH_TP1.TH_TP U3.1 | length 21.6
  Top Layer w0.2: v1(39.775,12.275) U3.1
  Bottom Layer w0.2: v1(39.775,12.275) 42.525,12.275 48.25,18 P2.4
LED_LV_A: P2.2 Q1.1 Q1.2 Q1.6 | length 12.9
  Top Layer w0.5: 56.75,6.25 59,6.25 62,9.25 62,13.5 P2.2
LED_LV_B: P2.3 Q1.3 | length 8.5
  Top Layer w0.5: Q1.3 58.7,7.2 60.5,9 P2.3
LED_LV_COMMON: L1.1 R7.2 R8.2 TH_TP2.TH_TP
NetC4_1: C4.1 D2.1 R4.1 TP3.TP U3.4 | length 15.7
  Top Layer w0.2: TP3.TP 31.075,21.925 C4.1 ; U3.4 42.775,13.775 v1(43.25,14.25)
  Bottom Layer w0.2: v1(34.75,20.25) 40.75,14.25 v1(43.25,14.25)
NetD1_2: D1.2 L1.2 U3.5 U3.6
NetD2_2: D2.2 D3.2 D4.2 R2.2 U2.2 U2.6 | length 0
  Top Layer w0.2: D2.2@30.375,19.775 D2.2
NetD3_1: D3.1 U2.1 | length 3.2
  Top Layer w0.2: U2.1 29.075,19.125 29.8,18.4 D3.1
NetD4_1: D4.1 U2.7 | length 6.8
  Top Layer w0.2: D4.1 24.4,17.6 25.1,18.3 25.1,19.4 24.725,19.775 U2.7
NetQ1_4: Q1.4 R8.1 | length 4.2
  Top Layer w0.5: R8.1 51,8.25 52.05,7.2 Q1.4
NetQ1_5: Q1.5 R7.1 | length 4.1
  Top Layer w0.5: R7.1 51,5.25 52,6.25 Q1.5
NetR3_2: R3.2 R5.3 | length 4.7
  Top Layer w0.2: R3.2 20.25,4.75 20.5,4.5 R5.3
NetR5_2: R5.2 TP2.TP U2.5 | length 18.7
  Top Layer w0.2: TP2.TP R5.2 v1(25.25,11.25) ; U2.5 v1(23.8,22.25)
  Bottom Layer w0.2: v1(23.8,22.25) 23.8,11.95 24.5,11.25 v1(25.25,11.25)
THERM_RES: P2.5 R6.2 TP4.TP U2.3 | length 42.3
  Top Layer w0.2: U2.3 28.217,20.408 29.058,20.408 v1(29.75,21.1) ; v1(29.75,10) TP4.TP ; 31.5,10 R6.2 v1(38.75,10)
  Bottom Layer w0.2: v1(29.75,10) v1(29.75,21.1) ; v1(38.75,10) 41.25,10 46.25,15 P2.5
VBAT: C1.1 C3.1 C5.1 D1.1 P1.1 R1.1 TH_TP4.TH_TP U1.1 U1.3 U3.8 | length 9.4
  Top Layer w0.2: v1(14.65,18.85) U1.3
  Bottom Layer w0.2: P1.1 9.5,17.7 10.65,18.85 v1(14.65,18.85)
pads on no net: M1. M2. M3. M4. P1. P2. R6.1 U1.4 U3.7

## Polygon pours and split planes (outlines as drawn)
GND on Top Layer "GND_L01_P029" (solid, remove dead copper, pour order 29): 0,0 0,30 70,30 70,0
NetC4_1 on Top Layer "NETC4_1_L01_P026" (solid, remove dead copper, pour order 26): 31.5,22.25 36.25,22.25 36.25,18.9 31.5,18.9
VBAT on Top Layer "VBAT_L01_P024" (solid, remove dead copper, pour order 24): 33.8,17 33.8,18.6 36.25,18.6 36.25,26.25 15.75,26.25 15.75,21.5 11,21.5 11,5 15,5 15,0 11,0 0,0 0,30 49.5,30 49.5,23.25 40.75,23.25 40.75,17
LED_HV on Top Layer "LED_HV_L01_P023" (solid, remove dead copper, pour order 23): 62,13.5 60,15.5 56,15.5 52,19.5 52,23.25 49.5,23.25 49.5,30 70,30 70,0 52,0 52,5.25 58,5.25 62,9.25
NetD1_2 on Top Layer "NETD1_2_L01_P022" (solid, remove dead copper, pour order 22): 40.75,17 43,17 45.5,19.5 52,19.5 52,23.25 40.75,23.25
LED_LV_COMMON on Top Layer "LED_LV_COMMON_L01_P021" (solid, remove dead copper, pour order 21): 46,14 46,10.75 44.25,10.75 44.25,0 52.5,0 52.5,14
LED_LV_A on Top Layer "LED_LV_A_L01_P019" (solid, remove dead copper, pour order 19): 52,7.2 52,4 58.75,4 58.75,7.2
LDO_5V on Top Layer "LDO_5V_L01_P011" (solid, pour order 11): 20.5,16 20.5,17.5 25.1,17.5 25.1,18.3 25.1,20 21.3,20 21.3,24 15.7,24 15.7,16
NetD2_2 on Top Layer "NETD2_2_L01_P008" (solid, pour order 8): 28.663,20.1 28.662,20.9 31.8,20.9 31.8,18.6 33.6,18.6 33.6,16 24.8,16 24.8,20 20.9,20 20.9,21.2 21.7,21.2 21.7,24 26,24 26,20.9 26.8,20.1
no net on Top Layer "NONET_L01_P027" (solid, remove dead copper, pour order 27): 31.8,18.5
no net on Top Layer "NONET_L01_P025" (solid, remove dead copper, pour order 25): 31.8,20.9
no net on Top Layer "NONET_L01_P020" (solid, remove dead copper, pour order 20): 48.25,3.5
no net on Top Layer "NONET_L01_P018" (solid, remove dead copper, pour order 18): 53,6.75
GND on Top Layer "GND_L01_P016" (solid, pour order 16): 14,28
no net on Top Layer "NONET_L01_P014" (solid, pour order 14): 0,0
NetD2_2 on Top Layer "NETD2_2_L01_P010" (solid, pour order 10): 25.1,18.7
NetD2_2 on Top Layer "NETD2_2_L01_P009" (solid, pour order 9): 29.2,15.1
NetD2_2 on Top Layer "NETD2_2_L01_P006" (solid, pour order 6): 13.8,22.8
no net on Top Layer "NONET_L01_P002" (solid, pour order 2): 52,17
no net on Top Layer "NONET_L01_P001" (solid, pour order 1): 70.325,37.075
no net on Top Layer "NONET_L01_P000" (solid, pour order 0): 28.6,13.5
GND on Bottom Layer "GND_L02_P028" (solid, remove dead copper, pour order 28): 0,30 70,30 70,0 0,0

## Keep-outs
Keep-Out Layer:
  the board outline again, w0.254

## Silkscreen, mask and mechanical layers (free items; w line width, h text height)
Top Overlay:
  drawing of 9 lines, arcs and shapes, not listed
  text "MSXIV Lights Driver .projectRevision" at 16.45,27.517 h0.8
  text "BRIGHTNESS" at 21.4,2.15 h0.8
  text "TEMPERATURE" at 30.9,2.15 h0.8
Bottom Overlay:
  text "HV" at 55.85,17.6 h0.8
  text "VBAT" at 10.85,16.6 h0.8
  text "HV" at 63.483,16.6 h0.8
  text "LV_A" at 65.082,14.667 h0.8
  text "GND" at 16.35,14.6 h0.8
  text "THERM" at 56.1,14.6 h0.8
  text "LV_B" at 65.082,12.667 h0.8
  text "TO PWR DISTR" at 16.85,12.1 h0.8
  text "GND" at 55.85,11.6 h0.8
  text "TO LEDS" at 61.85,9.35 h0.8
  text "LED_LV" at 45.932,1.917 h0.8
  text "LED_HV" at 60.432,1.917 h0.8
  text "VBAT" at 14.45,1 h0.8
  text "GND" at 19.05,1 h0.8